# Altium PCB TYPE-C-SMD_MC-306LS-H50_2024-12-15.pcbdoc
Units mm, origin at the board's own origin, x right, y up, seen from the top; angles counter-clockwise.
Board outline 38.26 x 29.42 mm, 2 copper layers (Top Layer, Bottom Layer); 1 components, 0 nets, 8 pads, 0 vias.
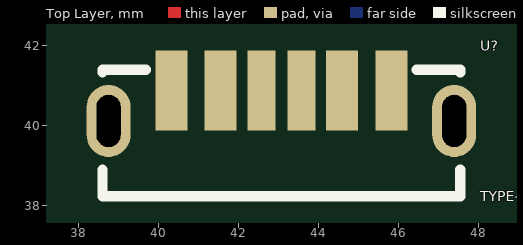
[diagram p0: Top Layer view]
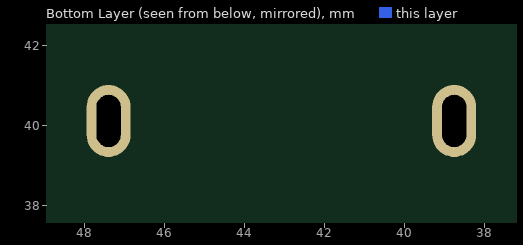
[diagram p1: Bottom Layer view, seen from below]

## Layer stack, top to bottom
Top Layer: signal copper (thickness not stored)
Dielectric: dielectric 0.32, FR-4, Dk 4.8
Bottom Layer: signal copper (thickness not stored)

## Board outline
63.661,25.4 25.4,25.4 25.4,54.821 63.661,54.821

## Components (designator, comment, footprint, x,y, rotation, side; value= is the part's Value field where it differs from the comment)
U? "TYPE-C-SMD_MC-306LS-H50" TYPE-C-SMD_MC-306LS-H50 43.07,39.983 r0 top

## Footprints (in the part's own frame and the unit in brackets; to place one, negate y for a bottom-side part, rotate by r counter-clockwise, add the part's x,y. Pads: shape width x height; smd on the part's side, far side on the other; paste and mask are expansions set on the pad)
TYPE-C-SMD_MC-306LS-H50 [mm]
  oval 1.1x1.8 hole 0.6 slot 1.3 at 90 deg paste+0 mask+0.05: 7(4.32,0.123) 8(-4.32,0.123)
  rect 0.7x2 smd paste-100 mask+0.05: A5(0.5,0.883) B5(-0.5,0.883)
  rect 0.8x2 smd paste-100 mask+0.05: A9(1.52,0.883) A12(2.75,0.883) B9(-1.52,0.883) B12(-2.75,0.883)
  silkscreen extent -4.47,-1.76 4.47,1.4

## Nets (pads, with @x,y where several pads share a name; then routed paths per layer and width w, separated by ;. In a path a pad name is that pad's centre, name@x,y a point inside that pad or via, vN(x,y) a via of type N, cw(c..) or ccw(c..) an arc to the next point about the centre after c; other vN are vias at no path point)
pads on no net: U?.7 U?.8 U?.A5 U?.A9 U?.A12 U?.B5 U?.B9 U?.B12